# Altium PCB PCB1.PcbDoc
Units mm, origin at the board's own origin, x right, y up, seen from the top; angles counter-clockwise.
Board outline 55.63 x 56.77 mm, 2 copper layers (Top Layer, Bottom Layer); 7 components, 16 nets, 55 pads, 1 vias.
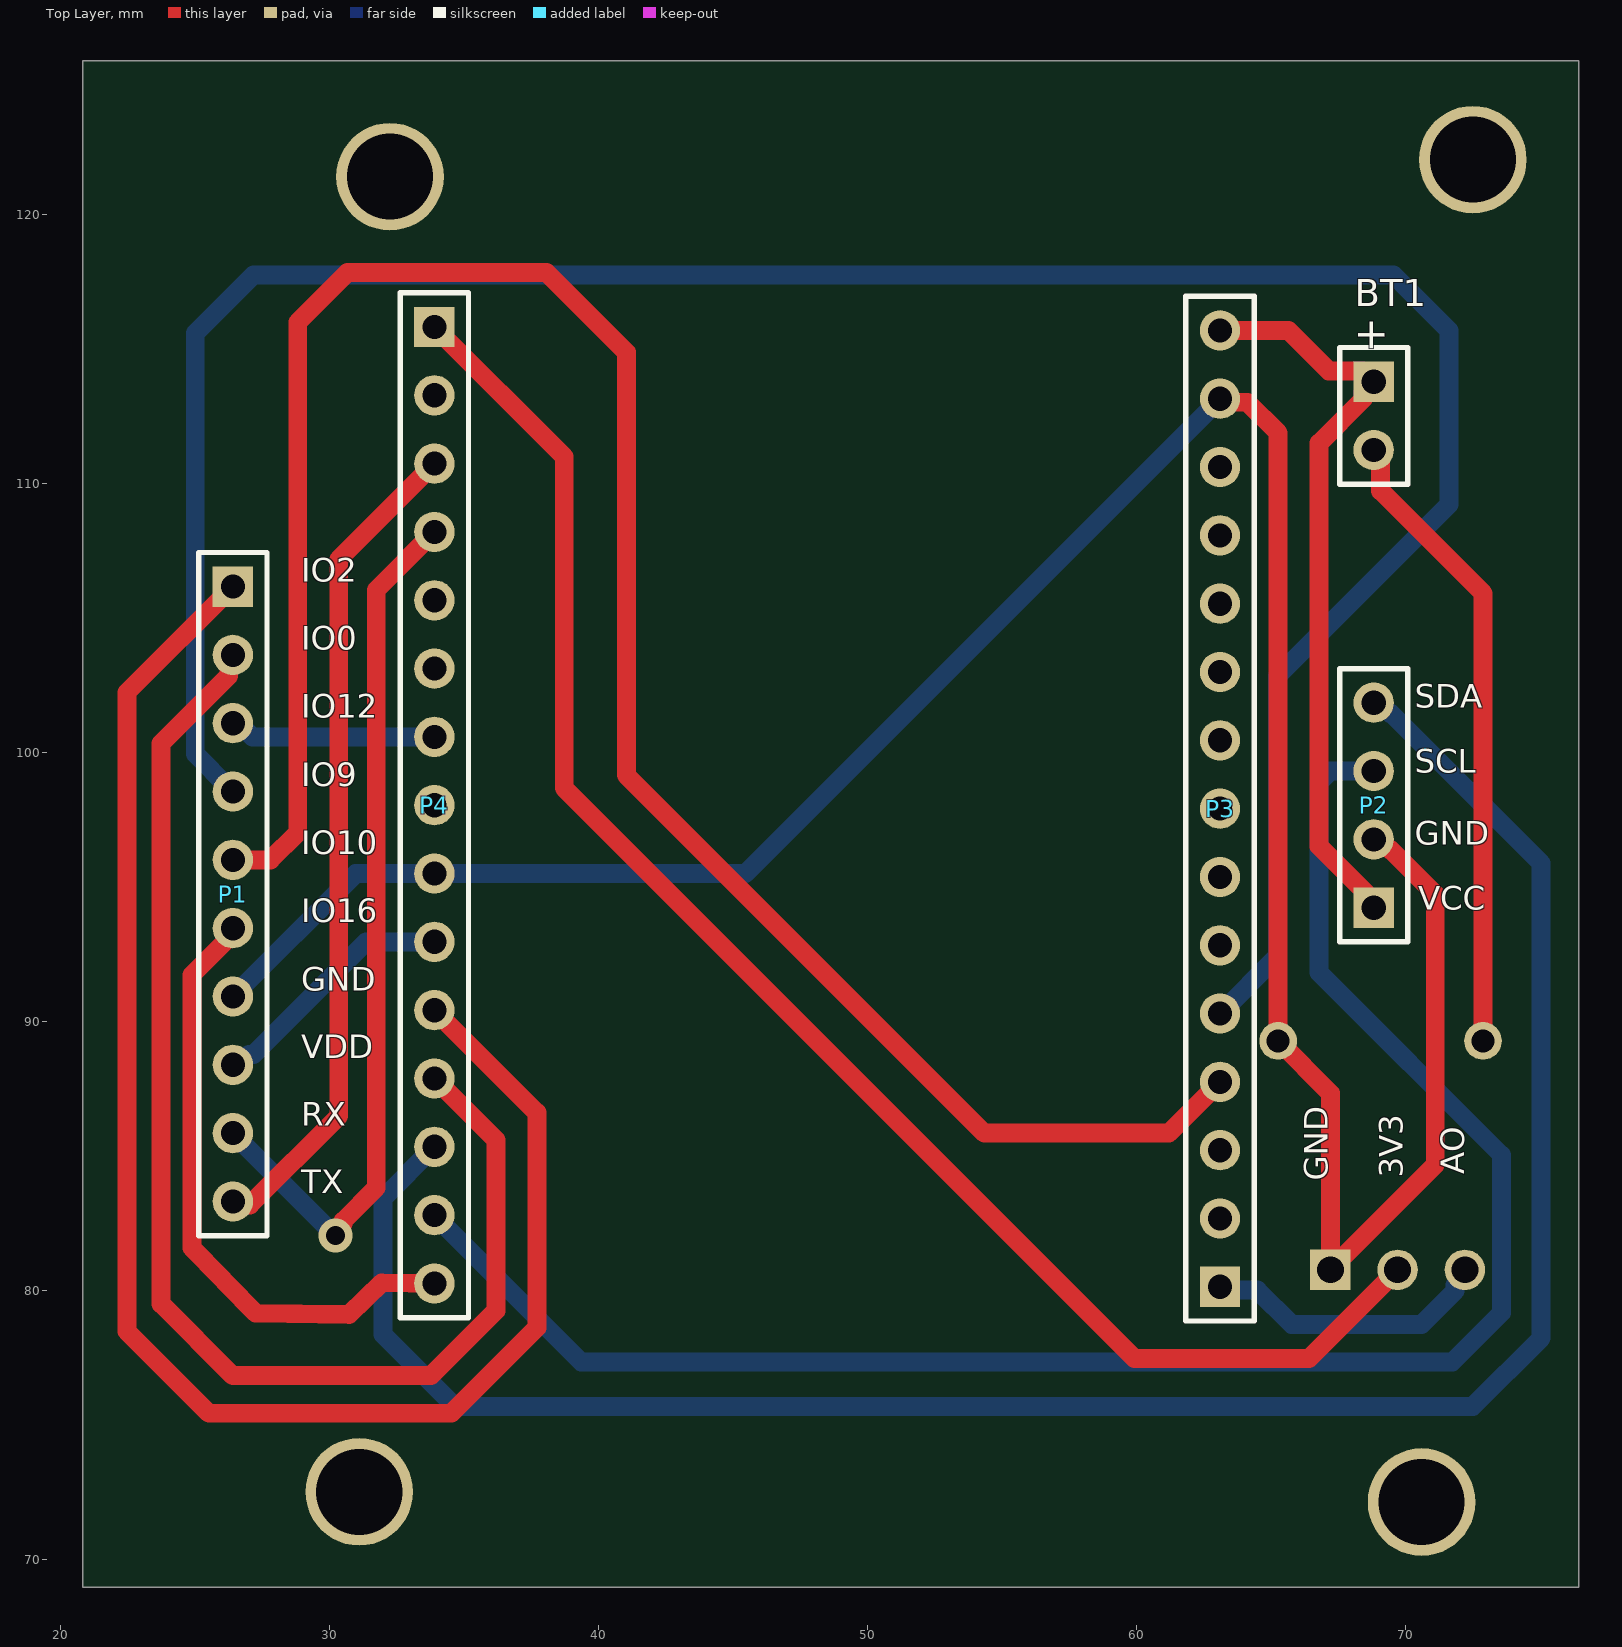
[diagram p0: Top Layer view]
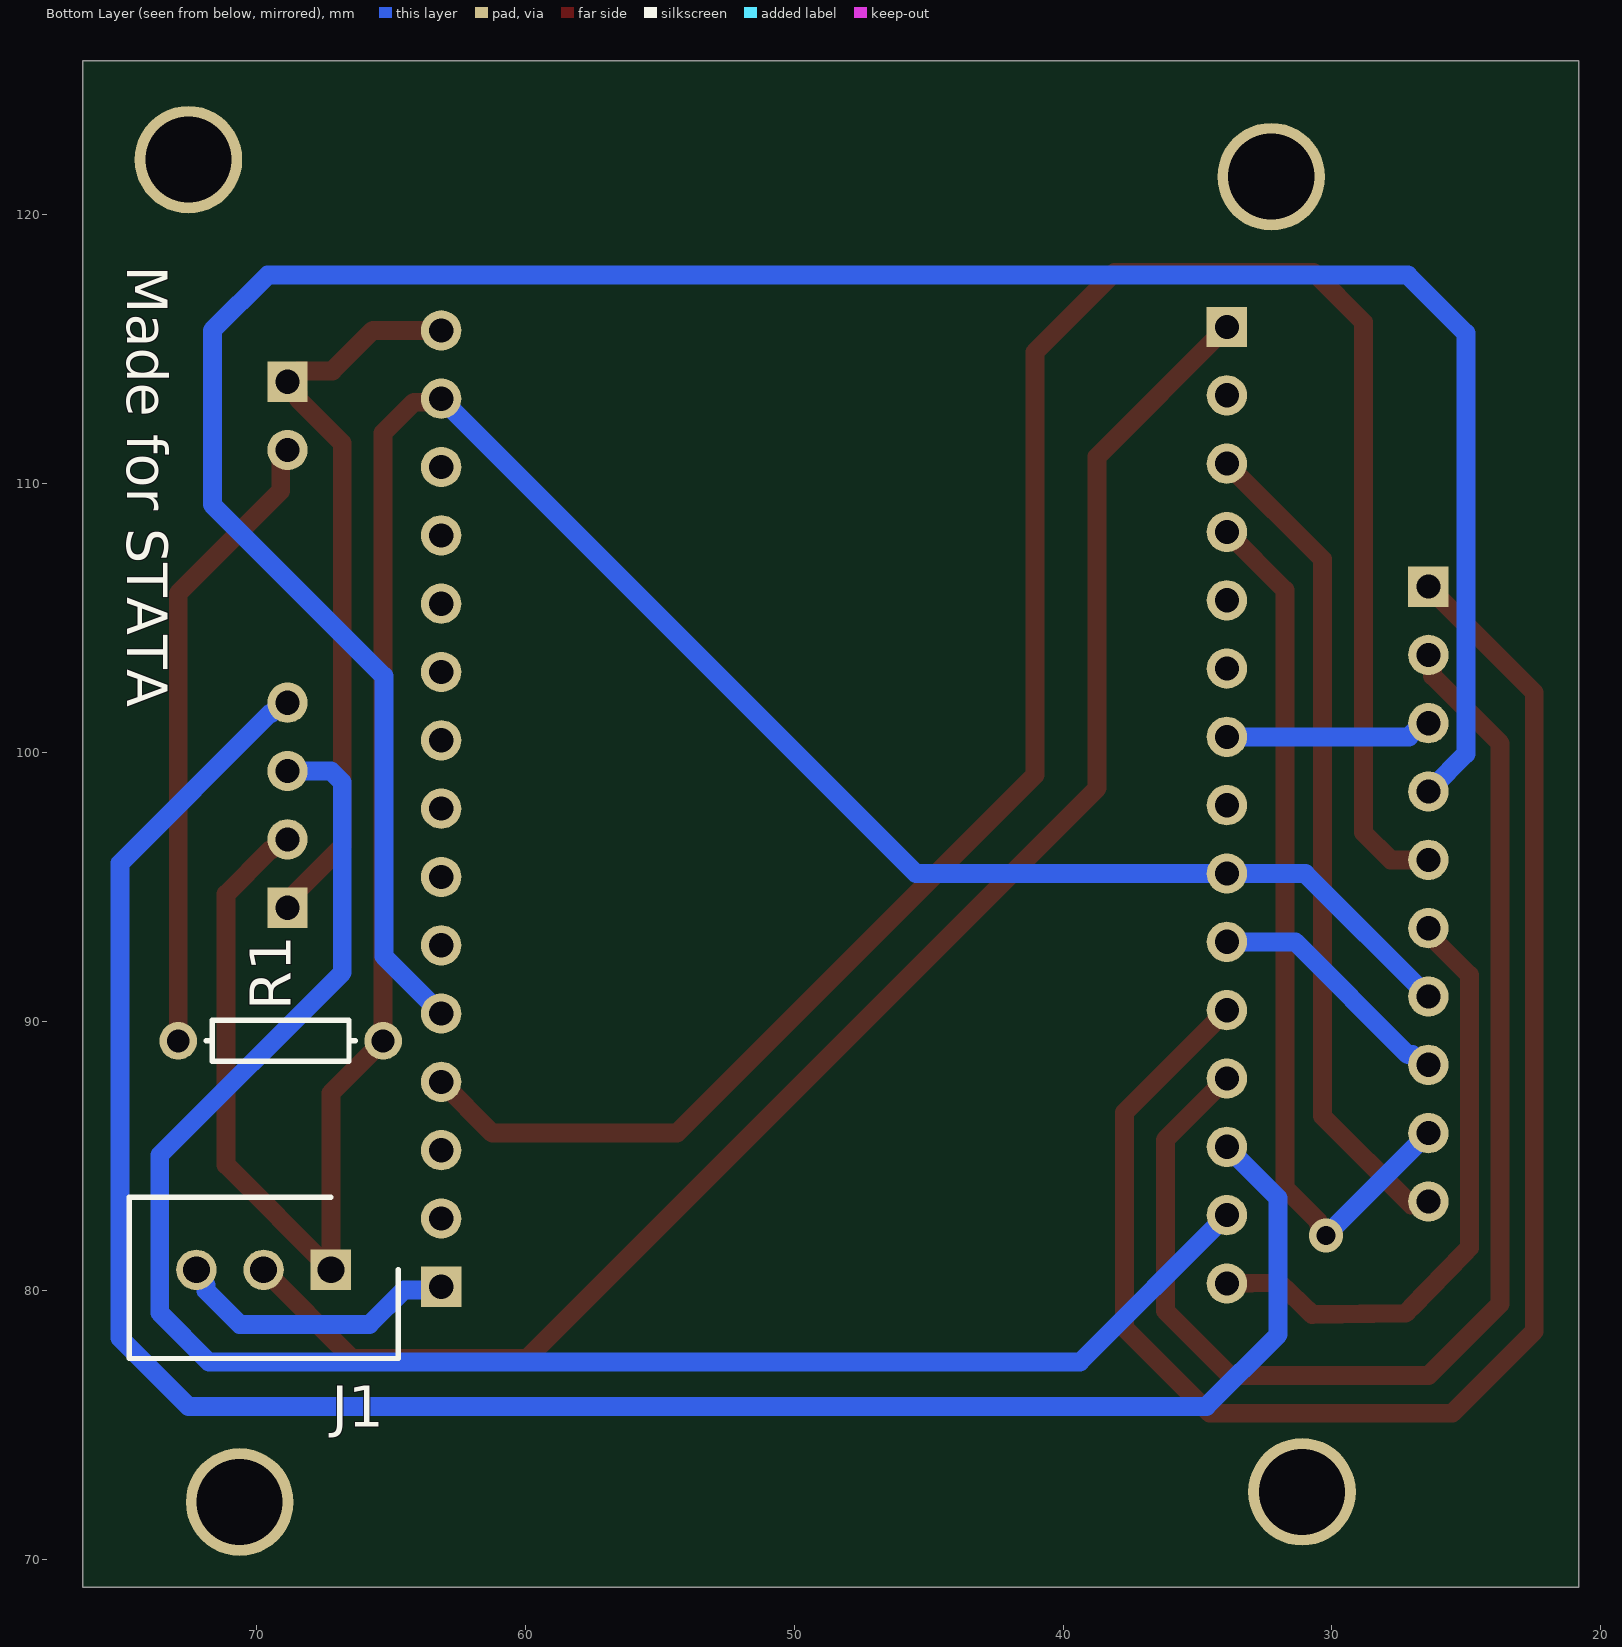
[diagram p1: Bottom Layer view, seen from below]

## Layer stack, top to bottom
Top Solder: solder mask 0.0102, Solder Resist, Dk 3.5
Top Layer: signal copper 0.0356
Dielectric 1: dielectric 0.32, FR-4, Dk 4.8
Bottom Layer: signal copper 0.0356
Bottom Solder: solder mask 0.0102, Solder Resist, Dk 3.5

## Board outline
20.828,68.961 76.454,68.961 76.454,125.73 20.828,125.73

## Design rules (kind name [scope] priority, off if disabled: settings)
Clearance [All] p1: gap=0.254 ignorepadtopadclearanceinfootprint=FALSE except(0: Arc-Hole Track-Hole SMDPad-Hole THPad-Hole Via-Hole Fill-Hole Poly-Hole Region-Hole Text-Hole)
PolygonConnect [All] p1: connectstyle=Relief reliefconductorwidth=0.254 reliefentries=4 polygonreliefangle="90 Angle" airgapwidth=0.254
RoomDefinition Sheet2 [InComponentClass('Sheet2')] p1: confinementstyle=ConfineIn formatcopy=TRUE lockcomponents=FALSE outline 178.943,26.924 228.346,26.924 228.346,80.264 178.943,80.264
RoutingVias [All] p1: holewidth=0.711 width=1.27 viastyle="Through Hole" minholewidth=0.711 minwidth=1.27 maxholewidth=0.711 maxwidth=1.27
SolderMaskExpansion [All] p1: expansion=0.102 istentingtop=FALSE
Width [All] p1: maxlimit=0.8 minlimit=0.7 preferedwidth=0.7 minimp=50.000000 maximp=50.000000 favimp=50.000000
30 further rules are at their usual default settings.

## Components (designator, comment, footprint, x,y, rotation, side; value= is the part's Value field where it differs from the comment)
BT1 "Battery" BAT-2 68.834,112.522 r270 top
J1 "03JQ-BT" SHDR3W80P0X250_1X3_1000X600X950P 67.223,80.772 r0 bottom
P1 "Header 10" HDR1X10 26.416,106.172 r270 top
P2 "Header 4" HDR1X4 68.834,94.234 r90 top
P3 "Header 15" HDR1X15 63.119,80.137 r90 top
P4 "Header 15" HDR1X15 33.909,115.824 r270 top
R1 "Res1" AXIAL-0.3 69.088,89.281 r180 bottom value=1K

## Footprints (in the part's own frame and the unit in brackets; to place one, negate y for a bottom-side part, rotate by r counter-clockwise, add the part's x,y. Pads: shape width x height; smd on the part's side, far side on the other; paste and mask are expansions set on the pad)
AXIAL-0.3 [mm] "Axial Device, Thru-Hole; 2 Leads; 0.3 in Pin Spacing"
  round 1.4 hole 0.85: 1(-3.81,0) 2(3.81,0)
  silkscreen extent -2.77,-0.76 2.77,0.76
BAT-2 [mm] "Battery; 2 Leads"
  rect 1.5x1.5 hole 0.9: 1(-1.27,0)
  round 1.5 hole 0.9: 2(1.27,0)
  silkscreen extent -2.54,-1.27 2.54,1.27
HDR1X4 [mm] "Connector; Header; 4 Position"
  rect 1.5x1.5 hole 0.9: 1(0,0)
  round 1.5 hole 0.9: 2(2.54,0) 3(5.08,0) 4(7.62,0)
  silkscreen extent -1.27,-1.27 8.89,1.27
HDR1X10 [mm] "Connector; Header; 10 Position"
  rect 1.5x1.5 hole 0.9: 1(0,0)
  round 1.5 hole 0.9: 2(2.54,0) 3(5.08,0) 4(7.62,0) 5(10.16,0) 6(12.7,0) 7(15.24,0) 8(17.78,0) 9(20.32,0) 10(22.86,0)
  silkscreen extent -1.27,-1.27 24.13,1.27
HDR1X15 [mm] "Connector; Header; 15 Position"
  rect 1.5x1.5 hole 0.9: 1(0,0)
  round 1.5 hole 0.9: 2(2.54,0) 3(5.08,0) 4(7.62,0) 5(10.16,0) 6(12.7,0) 7(15.24,0) 8(17.78,0) 9(20.32,0) 10(22.86,0) 11(25.4,0) 12(27.94,0) 13(30.48,0) 14(33.02,0) 15(35.56,0)
  silkscreen extent -1.27,-1.27 36.83,1.27
SHDR3W80P0X250_1X3_1000X600X950P [mm]
  rect 1.5x1.5 hole 1: 1(0,0)
  round 1.5 hole 1: 2(2.5,0) 3(5,0)
  silkscreen extent -2.5,-2.7 7.5,3.3, body extent -2.5,-3 7.5,3, height 9.5

## Part data
BT1: "Multicell Battery", LatestRevisionDate=17-Jul-2002, LatestRevisionNote="Re-released for DXP Platform.", PackageDescription="Battery; 2 Leads", PackageReference=BAT-2, Published=24-Mar-1999, Publisher="Altium Limited"
J1: "Connector", Manufacturer_Name="JST (JAPAN SOLDERLESS TERMINALS)", Mouser Part Number=N/A, Datasheet Link=http://www.jst-mfg.com/product/pdf/eng/eJQ.pdf, Height=9.5mm, Manufacturer_Part_Number=03JQ-BT, Mouser Price/Stock=https://www.mouser.com/Search/Refine.aspx?Keyword=N%2FA
P1: "Header, 10-Pin", LatestRevisionDate=17-Jul-2002, LatestRevisionNote="Re-released for DXP Platform.", Publisher="Altium Limited"
P2: "Header, 4-Pin", LatestRevisionDate=17-Jul-2002, LatestRevisionNote="Re-released for DXP Platform.", Publisher="Altium Limited"
P3 P4: "Header, 15-Pin", LatestRevisionDate=17-Jul-2002, LatestRevisionNote="Re-released for DXP Platform.", Publisher="Altium Limited"
R1: "Resistor", LatestRevisionDate=17-Jul-2002, LatestRevisionNote="Re-released for DXP Platform.", PackageDescription="Axial Device, Thru-Hole; 2 Leads; 0.3 in Pin Spacing", PackageReference=AXIAL-0.3, Published=8-Jun-2000, Publisher="Altium Limited"

## Free pads (board coordinates)
  round 4 hole 3.2: 1(32.258,121.412) 5(72.517,122.047) 6(70.612,72.136) 7(31.115,72.517)

## Via types
v1: diameter 1.27, hole 0.711, Top Layer to Bottom Layer, 1 vias

## Nets (pads, with @x,y where several pads share a name; then routed paths per layer and width w, separated by ;. In a path a pad name is that pad's centre, name@x,y a point inside that pad or via, vN(x,y) a via of type N, cw(c..) or ccw(c..) an arc to the next point about the centre after c; other vN are vias at no path point)
3V3: J1.2 P4.1 | length 60.3
  Top Layer w0.7: P4.1 38.735,110.998 38.735,98.679 59.944,77.47 66.421,77.47 J1.2
AOUT: J1.3 P3.1 | length 10.8
  Bottom Layer w0.7: P3.1 63.239,80.017 64.509,80.017 65.786,78.74 70.612,78.74 71.861,79.989 71.861,80.193 72.223,80.556 J1.3
GND: J1.1 P1.7 P2.2 P3.14 P4.9 R1.2 | length 99.2
  Top Layer w0.7: P3.14 63.247,113.029 64.136,113.029 65.278,111.887 R1.2 67.223,87.336 J1.1 71.12,84.669 71.12,94.742 69.488,96.374 69.45,96.374 69.05,96.774 P2.2
  Bottom Layer w0.7: P1.7 30.988,95.504 P4.9 45.466,95.504 P3.14
GPIO0: P1.2 P4.12 | length 49.4
  Top Layer w0.7: P1.2 26.263,103.479 26.263,102.854 23.749,100.34 23.749,79.502 26.416,76.835 33.782,76.835 36.195,79.248 36.195,85.598 P4.12
GPIO2: P1.1 P4.11 | length 60.5
  Top Layer w0.7: P1.1 22.479,102.235 22.479,78.486 25.527,75.438 34.544,75.438 37.719,78.613 37.719,86.614 P4.11
GPIO9: P1.4 P3.5 | length 94.7
  Bottom Layer w0.7: P1.4@26.288,98.68 25.019,99.949 25.019,115.595 27.178,117.754 69.571,117.754 71.628,115.697 71.628,109.22 65.253,102.845 65.253,92.431 P3.5
GPIO10: P1.5 P3.4 | length 80.1
  Top Layer w0.7: P1.5 27.813,96.012 28.829,97.028 28.829,116.002 30.683,117.856 38.075,117.856 41.046,114.884 41.046,99.162 54.356,85.852 61.214,85.852 P3.4
GPIO12: P1.3 P4.7 | length 7.7
  Bottom Layer w0.7: P1.3 26.632,101.092 27.14,100.584 P4.7
GPIO16: P1.6 P4.15 | length 23
  Top Layer w0.7: P1.6 26.416,93.256 24.892,91.732 24.892,81.877 24.892,81.593 25.09,81.389 27.062,79.361 27.266,79.157 30.735,79.109 31.951,80.291 P4.15
NetBT1_2: BT1.2 R1.1 | length 23.4
  Top Layer w0.7: BT1.2@69.088,111.125 69.088,109.728 72.898,105.918 R1.1
RX: P1.9 P4.4 | length 33.1
  Top Layer w0.7: v1(30.226,82.042) 30.226,82.196 30.511,82.481 30.511,82.581 31.75,83.82 31.75,106.045 P4.4
  Bottom Layer w0.7: P1.9 v1(30.226,82.042)
SCL: P2.3 P4.14 | length 67.4
  Bottom Layer w0.7: P4.14 39.37,77.343 71.755,77.343 73.584,79.172 73.584,85.039 66.802,91.821 66.802,98.904 67.212,99.314 P2.3
SDA: P2.4 P4.13 | length 79.3
  Bottom Layer w0.7: P4.13 32.004,83.439 32.004,78.359 34.671,75.692 72.517,75.692 75.057,78.232 75.057,95.885 69.488,101.454 69.45,101.454 69.05,101.854 P2.4
TX: P1.10 P4.3 | length 30.4
  Top Layer w0.7: P1.10@27.051,83.185 30.353,86.487 30.353,107.188 P4.3
VDD: BT1.1 P2.1 P3.15 | length 27.7
  Top Layer w0.7: P3.15 65.659,115.697 67.164,114.192 68.434,114.192 68.707,113.919 68.707,113.411 68.453,113.411 68.434,113.392 68.434,113.138 66.802,111.506 66.802,96.52 P2.1@68.961,94.361
VDD3: P1.8 P4.10 | length 9.3
  Bottom Layer w0.7: P1.8@26.67,88.265 26.67,88.43 27.015,88.774 27.179,88.774 31.369,92.964 P4.10
pads on no net: P3.2 P3.3 P3.6 P3.7 P3.8 P3.9 P3.10 P3.11 P3.12 P3.13 P4.2 P4.5 P4.6 P4.8

## Silkscreen, mask and mechanical layers (free items; w line width, h text height)
Top Overlay:
  text "IO2" at 28.956,106.061 h1.5
  text "IO0" at 28.956,103.527 h1.5
  text "SDA" at 70.358,101.362 h1.5
  text "IO12" at 28.956,100.993 h1.5
  text "SCL" at 70.358,98.949 h1.5
  text "IO9" at 28.956,98.458 h1.5
  text "GND" at 70.358,96.282 h1.5
  text "IO10" at 28.956,95.924 h1.5
  text "VCC" at 70.486,93.869 h1.5
  text "IO16" at 28.956,93.39 h1.5
  text "GND" at 28.956,90.856 h1.5
  text "VDD" at 28.957,88.338 h1.5
  text "RX" at 28.956,85.825 h1.5
  text "AO" at 72.501,84.328 h1.5 r90
  text "3V3" at 70.215,84.201 h1.5 r90
  text "GND" at 67.421,84.074 h1.5 r90
  text "TX" at 28.956,83.312 h1.5
Bottom Overlay:
  text "Made for STATA" at 74.79,118.11 h1.5 r90
Mechanical 1:
  lines w0.8: 21.082,68.961 25.146,68.961 76.454,68.961 76.454,125.73 21.082,125.73 21.082,109.506 21.082,87.217 21.082,76.303 21.082,68.961
Mechanical 13:
  lines w0.254: 33.932,122.301 33.932,122.809 ; 35.456,122.047 33.932,122.555 ; 35.456,123.063 33.932,122.555 ; 40.132,122.555 33.932,122.555 ; 56.18,122.555 62.38,122.555 ; 60.856,122.047 62.38,122.555 ; 60.856,123.063 62.38,122.555 ; 62.38,122.301 62.38,122.809
  text "28.448 (mm)" at 40.386,121.641 h1.52

## Text inside footprints (layer, text, board x,y; h text height)
BT1: Top Overlay "+" at 68.257,116.192 h1.15 r270